# Altium PCB PDB.PcbDoc
Units mm, origin at the board's own origin, x right, y up, seen from the top; angles counter-clockwise.
Board outline 22.2 x 30.2 mm, 2 copper layers (L1, L4), stack 0.37 mm thick; 15 components, 7 nets, 40 pads, 54 vias.
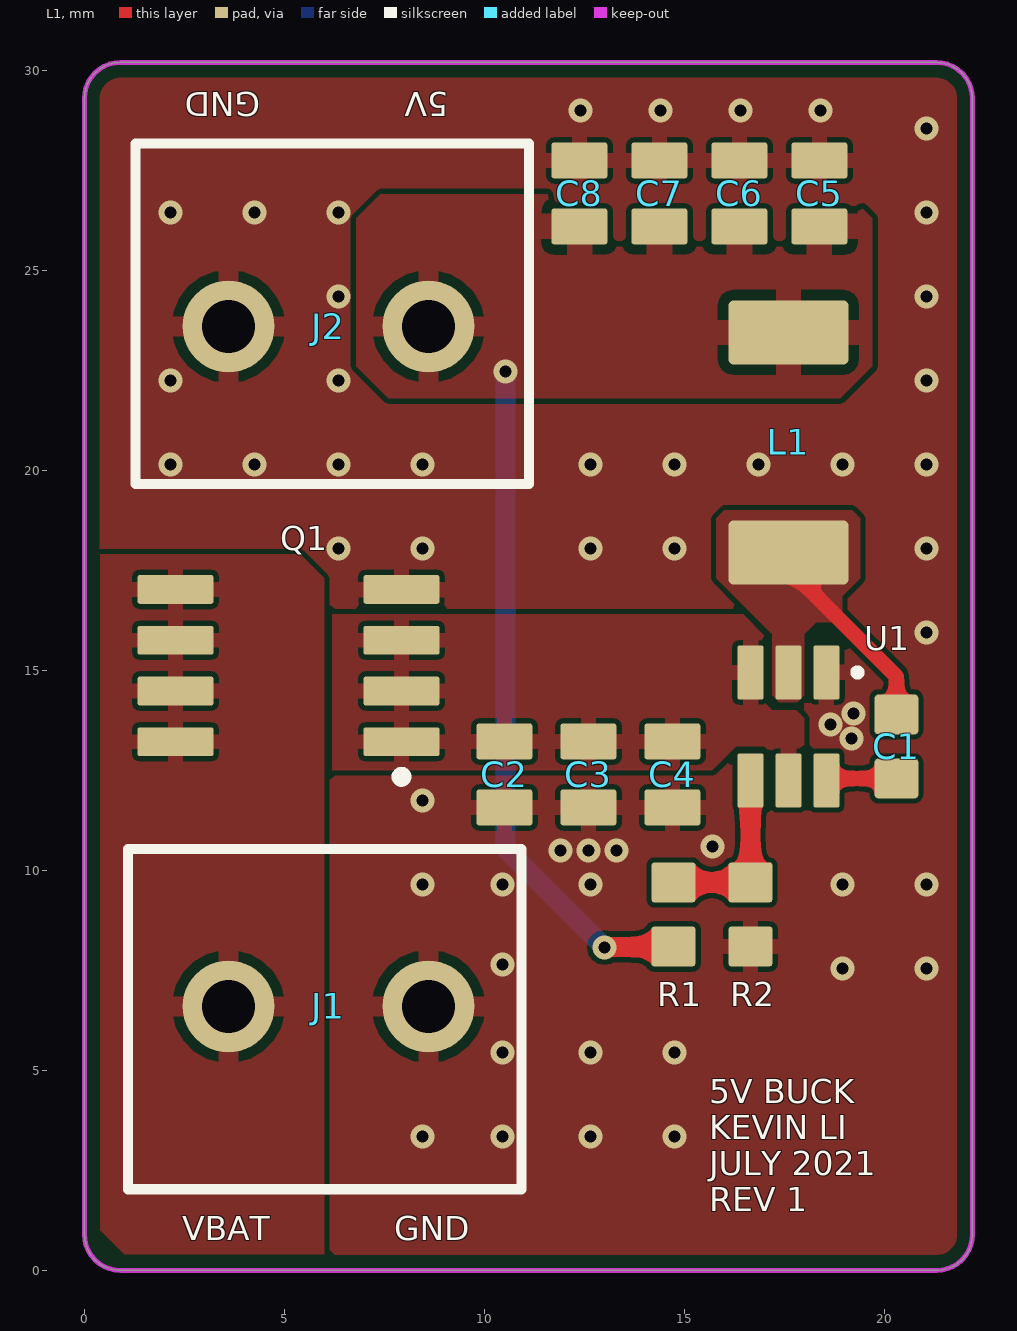
[diagram p0: L1 view]
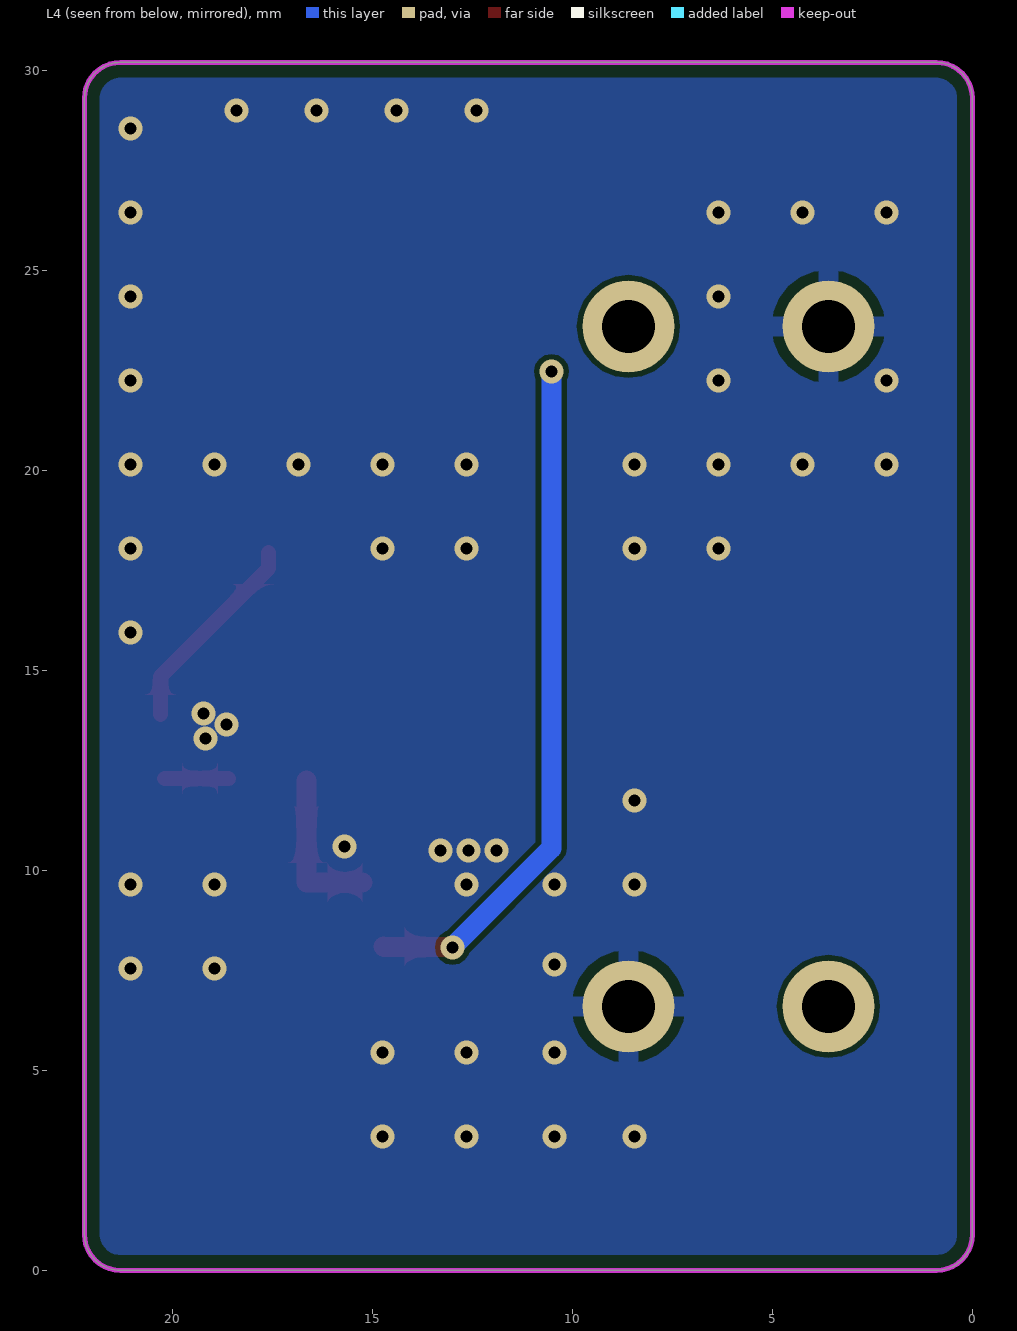
[diagram p1: L4 view, seen from below]
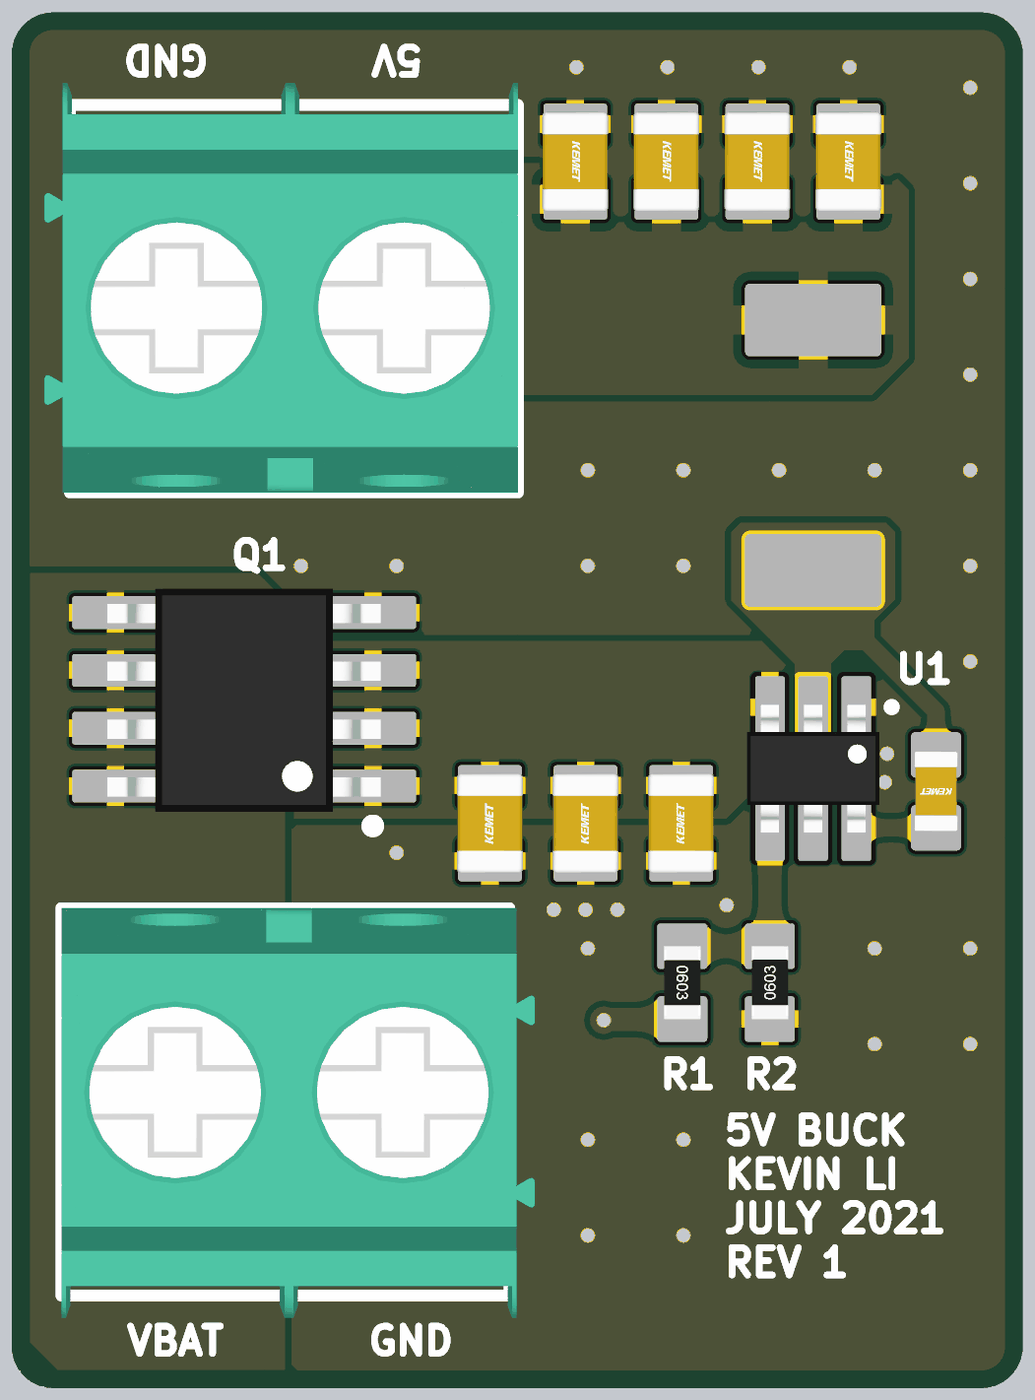
[diagram p2: 3D render of the assembled board from above, using the file's embedded part models]

## Layer stack, top to bottom
Top Solder: solder mask 0.01, Solder Resist, Dk 3.5
L1: signal copper 0.035
Dielectric 2: dielectric 0.3, FR-4, Dk 4.8
L4: signal copper 0.035
Bottom Solder: solder mask 0.01, Solder Resist, Dk 3.5

## Board outline
0,0.9 0,29.3 cw(c0.9,29.3) 0.9,30.2 21.3,30.2 cw(c21.3,29.3) 22.2,29.3 22.2,0.9 cw(c21.3,0.9) 21.3,0 0.9,0 cw(c0.9,0.9)

## Design rules (kind name [scope] priority, off if disabled: settings)
BoardOutlineClearance [All] p1: gap=0.381 ignorepadtopadclearanceinfootprint=FALSE
Clearance [All] p1: gap=0.127 ignorepadtopadclearanceinfootprint=FALSE except(0.25: Arc-Hole Track-Hole SMDPad-Hole THPad-Hole Via-Hole Fill-Hole Poly-Hole Region-Hole Text-Hole)
ComponentClearance [All] p1: gap=0.127 collisioncheckmode=3 verticalgap=0.127 showdistances=TRUE
DiffPairsRouting [All] p1: maxlimit=0.254 minlimit=0.127 mostfreqgap=0.127 toplayer_minwidth=0.127 toplayer_maxwidth=25.4 toplayer_prefwidth=0.127 bottomlayer_minwidth=0.127 bottomlayer_maxwidth=25.4 bottomlayer_prefwidth=0.127 maxuncoupledlength=12.7
Height [All] p1: minheight=0 maxheight=1816.048 prefheight=12.7
HoleSize [All] p1: absolutevalues=TRUE maxlimit=6.3 minlimit=0.3 maxpercent=80.000 minpercent=20.000
HoleToHoleClearance [All] p1: gap=0.25 allowstackedmicrovias=FALSE
MinimumAnnularRing [All] p1: minimumring=0.076
MinimumSolderMaskSliver [All] p1: minsoldermaskwidth=0
PlaneClearance [All] p1: clearance=0.127
PlaneConnect PlaneConnectPowerPads [InPadClass('PowerPads')] p1: planeconnectstyle=Direct reliefexpansion=0.508 reliefentries=4 reliefconductorwidth=0.254 reliefairgap=0.254
PlaneConnect [All] p2: pad.planeconnectstyle=Relief pad.reliefexpansion=0.3 pad.reliefentries=4 pad.reliefconductorwidth=0.127 pad.reliefairgap=0.127 via.planeconnectstyle=Direct via.reliefexpansion=0.3 via.reliefentries=4 via.reliefconductorwidth=0.127 via.reliefairgap=0.127
PolygonConnect PolygonConnectPowerPads [All vs (InPadClass('PowerPads'))] p1: connectstyle=Direct reliefconductorwidth=0.254 reliefentries=4 polygonreliefangle="90 Angle" airgapwidth=0.254
PolygonConnect PolygonConnectSW [InNet('SW') vs InNet('SW')] p2: thpad.connectstyle=Direct thpad.reliefconductorwidth=0.254 thpad.reliefentries=4 thpad.polygonreliefangle="90 Angle" thpad.airgapwidth=0.254 smdpad.connectstyle=Direct smdpad.reliefconductorwidth=0.635 smdpad.reliefentries=4 smdpad.polygonreliefangle="90 Angle" smdpad.airgapwidth=0.254 via.connectstyle=Relief via.reliefconductorwidth=0.254 via.reliefentries=4 via.polygonreliefangle="90 Angle" via.airgapwidth=0.254
PolygonConnect PolygonConnectReliefOutput [InNet('5V0') vs InNet('5V0')] p3: thpad.connectstyle=Relief thpad.reliefconductorwidth=0.254 thpad.reliefentries=4 thpad.polygonreliefangle="90 Angle" thpad.airgapwidth=0.254 smdpad.connectstyle=Relief smdpad.reliefconductorwidth=0.635 smdpad.reliefentries=4 smdpad.polygonreliefangle="90 Angle" smdpad.airgapwidth=0.254 via.connectstyle=Relief via.reliefconductorwidth=0.254 via.reliefentries=4 via.polygonreliefangle="90 Angle" via.airgapwidth=0.254
PolygonConnect PolygonConnectReliefInput [InNet('BAT') or InNet('VBAT') vs InNet('BAT') or InNet('VBAT')] p4: thpad.connectstyle=Relief thpad.reliefconductorwidth=0.254 thpad.reliefentries=4 thpad.polygonreliefangle="90 Angle" thpad.airgapwidth=0.127 smdpad.connectstyle=Relief smdpad.reliefconductorwidth=0.381 smdpad.reliefentries=4 smdpad.polygonreliefangle="90 Angle" smdpad.airgapwidth=0.127 via.connectstyle=Direct via.reliefconductorwidth=0.127 via.reliefentries=4 via.polygonreliefangle="90 Angle" via.airgapwidth=0.127
PolygonConnect PolygonConnectGND [InNet('GND') vs InNet('GND')] p5: thpad.connectstyle=Relief thpad.reliefconductorwidth=0.254 thpad.reliefentries=4 thpad.polygonreliefangle="90 Angle" thpad.airgapwidth=0.127 smdpad.connectstyle=Relief smdpad.reliefconductorwidth=0.381 smdpad.reliefentries=4 smdpad.polygonreliefangle="90 Angle" smdpad.airgapwidth=0.127 via.connectstyle=Direct via.reliefconductorwidth=0.127 via.reliefentries=4 via.polygonreliefangle="90 Angle" via.airgapwidth=0.127
PolygonConnect [All] p6: thpad.connectstyle=Relief thpad.reliefconductorwidth=0.127 thpad.reliefentries=4 thpad.polygonreliefangle="90 Angle" thpad.airgapwidth=0.127 smdpad.connectstyle=Relief smdpad.reliefconductorwidth=0.127 smdpad.reliefentries=4 smdpad.polygonreliefangle="90 Angle" smdpad.airgapwidth=0.127 via.connectstyle=Direct via.reliefconductorwidth=0.127 via.reliefentries=4 via.polygonreliefangle="90 Angle" via.airgapwidth=0.127
RoutingVias [All] p1: holewidth=0.3 width=0.6 viastyle="Through Hole" minholewidth=0.3 minwidth=0.6 maxholewidth=0.6 maxwidth=6.6
SilkToSilkClearance [All] p1: silktosilkclearance=0
SilkToSolderMaskClearance [IsPad] p1: minsilkscreentomaskgap=0.127 clearancetoexposedcopper=TRUE
SolderMaskExpansion [All] p1: expansion=0.075 istentingtop=FALSE
Width [All] p1: maxlimit=25.4 minlimit=0.127 preferedwidth=0.127 minimp=50.000000 maximp=50.000000 favimp=50.000000
20 further rules are at their usual default settings.

## Components (designator, comment, footprint, x,y, rotation, side; value= is the part's Value field where it differs from the comment)
C1 "CAP_100nF_50V_0603" CAP0603 20.3,13.1 r90 top value=100nF
C2 "CAP_10uF_50V_0805" CAP0805 10.5,12.4 r90 top value=10uF
C3 "CAP_10uF_50V_0805" CAP0805 12.6,12.4 r90 top value=10uF
C4 "CAP_10uF_50V_0805" CAP0805 14.7,12.4 r90 top value=10uF
C5 "CAP_10uF_50V_0805" CAP0805 18.375,26.925 r270 top value=10uF
C6 "CAP_10uF_50V_0805" CAP0805 16.375,26.925 r270 top value=10uF
C7 "CAP_10uF_50V_0805" CAP0805 14.375,26.925 r270 top value=10uF
C8 "CAP_10uF_50V_0805" CAP0805 12.375,26.925 r270 top value=10uF
J1 "CON_2POS_SCREW_TERM" 1935161 6.1,6.6 r0 top locked
J2 "CON_2POS_SCREW_TERM" 1935161 6.1,23.6 r180 top locked
L1 "IND_3.3uH_8.5A" SMMS0650-3R3M 17.6,20.7 r90 top value=3.3uH
Q1 "PMOS_30V_14A" SO-8_PMOS_AO4407C 5.1,15.1 r180 top locked
R1 "RES_57.6kΩ_0603_1%" RES0603 14.725,8.9 r270 top value=57.6kΩ
R2 "RES_10kΩ_0603_1%" RES0603 16.65,8.9 r90 top value=10kΩ
U1 "TPS565201DDCR" TPS565201DDCR 17.6,13.6 r270 top

## Footprints (in the part's own frame and the unit in brackets; to place one, negate y for a bottom-side part, rotate by r counter-clockwise, add the part's x,y. Pads: shape width x height; smd on the part's side, far side on the other; paste and mask are expansions set on the pad)
1935161 [mm] "TERM BLK 2POS SIDE ENTRY 5MM PCB"
  round 2.3 hole 1.325: 1(-2.5,0) 2(2.5,0)
  silkscreen extent -5.01,-4.57 4.83,3.94, body extent -5.01,-5.06 5.39,3.94, height 11.41
CAP0603 [mm]
  rrect20% 1x1.1 smd: 1(-0.8,0) 2(0.8,0)
  body extent -0.87,-0.48 0.88,0.48, height 0.87
CAP0805 [mm] "Chip Capacitor, Body 2.0x1.2mm, Height 0.45mm, IPC Medium Density"
  rrect15% 0.9x1.4 smd: 1(-0.825,0) 2(0.825,0)
  body extent -1.1,-0.73 1.1,0.73, height 1.39
RES0603 [mm] "Chip Resistor, Body 1.6x0.8mm, IPC Medium Density"
  rrect15% 1x1.1 smd: 1(-0.8,0) 2(0.8,0)
  body extent -0.8,-0.4 0.8,0.4, height 0.46
SMMS0650-3R3M [mm]
  rrect15% 1.6x3 smd: 1(-2.75,0) 2(2.75,0)
  body extent -3.55,-3.3 3.55,3.3, height 5
SO-8_PMOS_AO4407C [mm]
  rrect15% 1.9x0.72 smd: 1(-2.827,1.884) 1(-2.827,-0.656) 1(-2.827,0.614) 2(-2.827,-1.926) 3(2.823,1.884) 3(2.823,-0.656) 3(2.823,0.614) 3(2.823,-1.926)
  silkscreen extent -2.95,2.63 -2.7,2.88, body extent -3,-2.45 3,2.45, height 1.75
TPS565201DDCR [mm] "IC REG BUCK ADJ 5A TSOT23-6"
  rrect15% 1.35x0.65 smd mask+0.102: 1(-1.35,0.95) 2(-1.35,0) 3(-1.35,-0.95) 4(1.35,-0.95) 5(1.35,0) 6(1.35,0.95)
  silkscreen extent -1.4,1.68 -1.3,1.78, body extent -1.4,-1.45 1.4,1.45, height 1.45

## Part data
C1: "CAP CER 100NF 50V X7R 0603", LCSC Part #=C129621, Manufacturer 1=KEMET, Manufacturer Part Number 1=C0603C104K5RACAUTO, Package=0603, Temperature Coefficient=X7R, Tolerance=10%, Voltage=50V, Mounting Type="Surface Mount", Supplier 1=LCSC, Supplier Part Number 1=C129621
C2 C3 C4 C5 C6 C7 C8: "CAP CER 10UF 50V X5R 0805", LCSC Part #=C440198, Manufacturer 1="Murata Electronics", Manufacturer Part Number 1=GRM21BR61H106KE43L, Package=0805, Temperature Coefficient=X5R, Tolerance=10%, Voltage=50V, Mounting Type="Surface Mount", Supplier 1=LCSC, Supplier 2=Digi-Key, Supplier Part Number 1=C440198, Supplier Part Number 2=490-18663-1-ND
J1 J2: "TERM BLK 2POS SIDE ENTRY 5MM", Manufacturer 1="Phoenix Contact", Manufacturer Part Number 1=1935161, Package/Footprint=SMD, Supplier Part Number 1=277-1667-ND, Mounting Type=TH, Supplier 1=Digi-Key
L1: "IND 3.3UH 8.5A 22M OHM", Current Rating=8.5A, DC Resistance=20mΩ, LCSC Part #=C149581, Manufacturer 1="Shun Xiang Nuo Elec", Manufacturer Part Number 1=SMMS0650-3R3M, Saturation Current=9A, Test Frequency=100kHz, Tolerance=20%, Mounting Type="Surface Mount", Supplier 1=LCSC, Supplier Part Number 1=C149581
Q1: "MOSFET P-CH 30V 14A SO-8", Continuous Drain Current=-14A, Drain to Source Breakdown Voltage=-30V, Drain to Source On-Resistance=11.5mΩ, Gate to Source Voltage=±25V, LCSC Part #=C469397, Manufacturer 1="Alpha & Omega Semicon", Manufacturer Part Number 1=AO4407C, Max Power Dissipation=3.1W, Package=SO-8, Drain to Source Voltage=-30V, Supplier 1=LCSC, Supplier Part Number 1=C469397, Turn-Off Delay Time=40ns, Turn-On Delay Time=11ns
R1: "RES 57.6K OHM 1% 1/10W 0603", LCSC Part #=C23082, Manufacturer 1="Uniroyal Elec", Manufacturer Part Number 1=0603WAF5762T5E, Package=0603, Tolerance=1%, Mounting Type="Surface Mount", Supplier 1=LCSC, Supplier Part Number 1=C23082
R2: "RES 10K OHM 1% 1/10W 0603", LCSC Part #=C25804, Manufacturer 1="Uniroyal Elec", Manufacturer Part Number 1=0603WAF1002T5E, Package=0603, Tolerance=1%, Mounting Type="Surface Mount", Supplier 1=LCSC, Supplier Part Number 1=C25804
U1: "IC REG BUCK ADJ 5A TSOT23-6", LCSC Part #=C327676, Manufacturer="Texas Instruments", Package=SOT-23-6, ComponentLink1Description=http://www.ti.com/lit/ds/symlink/tps565201.pdf?src-supplier=Digi-Key, ComponentLink1URL=http://www.ti.com/lit/ds/symlink/tps565201.pdf?src-supplier=Digi-Key, Manufacturer Part Number=TPS565201DDCR, Mounting Type="Surface Mount", Supplier 1=LCSC, Supplier 2=Digi-Key, Supplier Part Number 1=C327676, Supplier Part Number 2=296-49006-1-ND

## Via types
v1: diameter 0.6, hole 0.3, L1 to L4, tented both sides, 54 vias

## Nets (pads, with @x,y where several pads share a name; then routed paths per layer and width w, separated by ;. In a path a pad name is that pad's centre, name@x,y a point inside that pad or via, vN(x,y) a via of type N, cw(c..) or ccw(c..) an arc to the next point about the centre after c; other vN are vias at no path point)
5V0: C5.2 C6.2 C7.2 C8.2 J2.1 L1.2 R1.2 | length 17.2
  L1 w0.508: v1(13,8.075) 13.012,8.087 14.713,8.087 R1.2
  L4 w0.508: v1(10.525,22.475) 10.525,10.55 v1(13,8.075)
BAT: J1.1 Q1.3
BOOT: C1.1 U1.6 | length 1.7
  L1 w0.254: U1.6 U1.6@18.6,12.3
  L1 w0.381: U1.6@18.6,12.3 C1.1@20.2,12.3
FB: R1.1 R2.2 U1.4 | length 4
  L1 w0.508: R1.1@15.25,9.7 R2.2 U1.4
GND: C2.1 C3.1 C4.1 C5.1 C6.1 C7.1 C8.1 J1.2 J2.2 Q1.2 R2.1 U1.1
  other v1: 8.45,3.35 10.45,3.35 12.65,3.35 14.75,3.35 10.45,5.45 12.65,5.45 14.75,5.45 18.95,7.55 21.05,7.55 10.45,7.65 8.45,9.65 10.45,9.65 12.65,9.65 18.95,9.65 21.05,9.65 11.9,10.5 12.6,10.5 13.3,10.5 15.7,10.6 8.45,11.75 19.175,13.3 18.65,13.65 19.225,13.925 21.05,15.95 6.35,18.05 8.45,18.05 12.65,18.05 14.75,18.05 21.05,18.05 2.15,20.15 4.25,20.15 6.35,20.15 8.45,20.15 12.65,20.15 14.75,20.15 16.85,20.15 18.95,20.15 21.05,20.15 2.15,22.25 6.35,22.25 21.05,22.25 6.35,24.35 21.05,24.35 2.15,26.45 4.25,26.45 6.35,26.45 21.05,26.45 21.05,28.55 12.4,29 14.4,29 16.4,29 18.4,29
SW: C1.2 L1.1 U1.2 | length 5.2
  L1 w0.381: L1.1 17.6,17.55 20.3,14.85 C1.2
VBAT: C2.2 C3.2 C4.2 Q1.1 U1.3 U1.5

## Polygon pours and split planes (outlines as drawn)
GND on L1 "GND" (solid, remove dead copper, pour order 22): 0,0.9 0,29.3 cw(c0.9,29.3) 0.9,30.2 21.3,30.2 cw(c21.3,29.3) 22.2,29.3 22.2,0.9 cw(c21.3,0.9) 21.3,0 0.9,0 cw(c0.9,0.9)
SW on L1 "SW" (solid, remove dead copper, pour order 19): 19.4,17.3 18.95,16.85 18.95,16.475 18.675,16.2 18.3,16.2 18,15.9 18,14.375 17.825,14.2 17.375,14.2 17.2,14.375 17.2,15.9 15.8,17.3 15.8,18.8 16,19 19.2,19 19.4,18.8
5V0 on L1 "5V" (solid, remove dead copper, pour order 12): 19.1,26.9 19.7,26.3 19.7,22.6 18.9,21.8 7.6,21.8 6.8,22.6 6.8,26.3 7.4,26.9
VBAT on L1 "VBAT" (solid, remove dead copper, pour order 17): 6.2,16.4 6.2,12.5 15.7,12.5 16.3,13.1 17,13.1 17.2,12.9 17.2,11.65 17.325,11.525 17.875,11.525 18,11.65 18,13.8 17.8,14 17.2,14 17,14.2 17,15.87 16.47,16.4
BAT on L1 "BAT" (solid, remove dead copper, pour order 13): 0.4,17.9 5.4,17.9 6,17.3 6,0.4 1,0.4 0.4,1
GND on L4 "GND" (solid, remove dead copper, pour order 20): 0,0.9 0,29.3 cw(c0.9,29.3) 0.9,30.2 21.3,30.2 cw(c21.3,29.3) 22.2,29.3 22.2,0.9 cw(c21.3,0.9) 21.3,0 0.9,0 cw(c0.9,0.9)

## Keep-outs
Keep-Out Layer:
  the board outline again, w0.127

## Silkscreen, mask and mechanical layers (free items; w line width, h text height)
Top Overlay:
  text "GND" at 4.4,29.45 h0.6 r180
  text "5V" at 9.1,29.45 h0.6 r180
  text "5V BUCK / KEVIN LI / JULY 2021 / REV 1" at 15.625,1.475 h0.6
  text "VBAT" at 2.45,0.75 h0.6
  text "GND" at 7.75,0.75 h0.6